# Altium PCB GALX4-0047N_PCB-1109N_REV-A.PcbDoc (part 1 of 2)
Units mil, origin at the board's own origin, x right, y up, seen from the top; angles counter-clockwise.
Board outline 3900 x 7750 mil, 2 copper layers (Top, Bottom), stack 64.8 mil thick; 240 components, 158 nets, 844 pads, 146 vias.
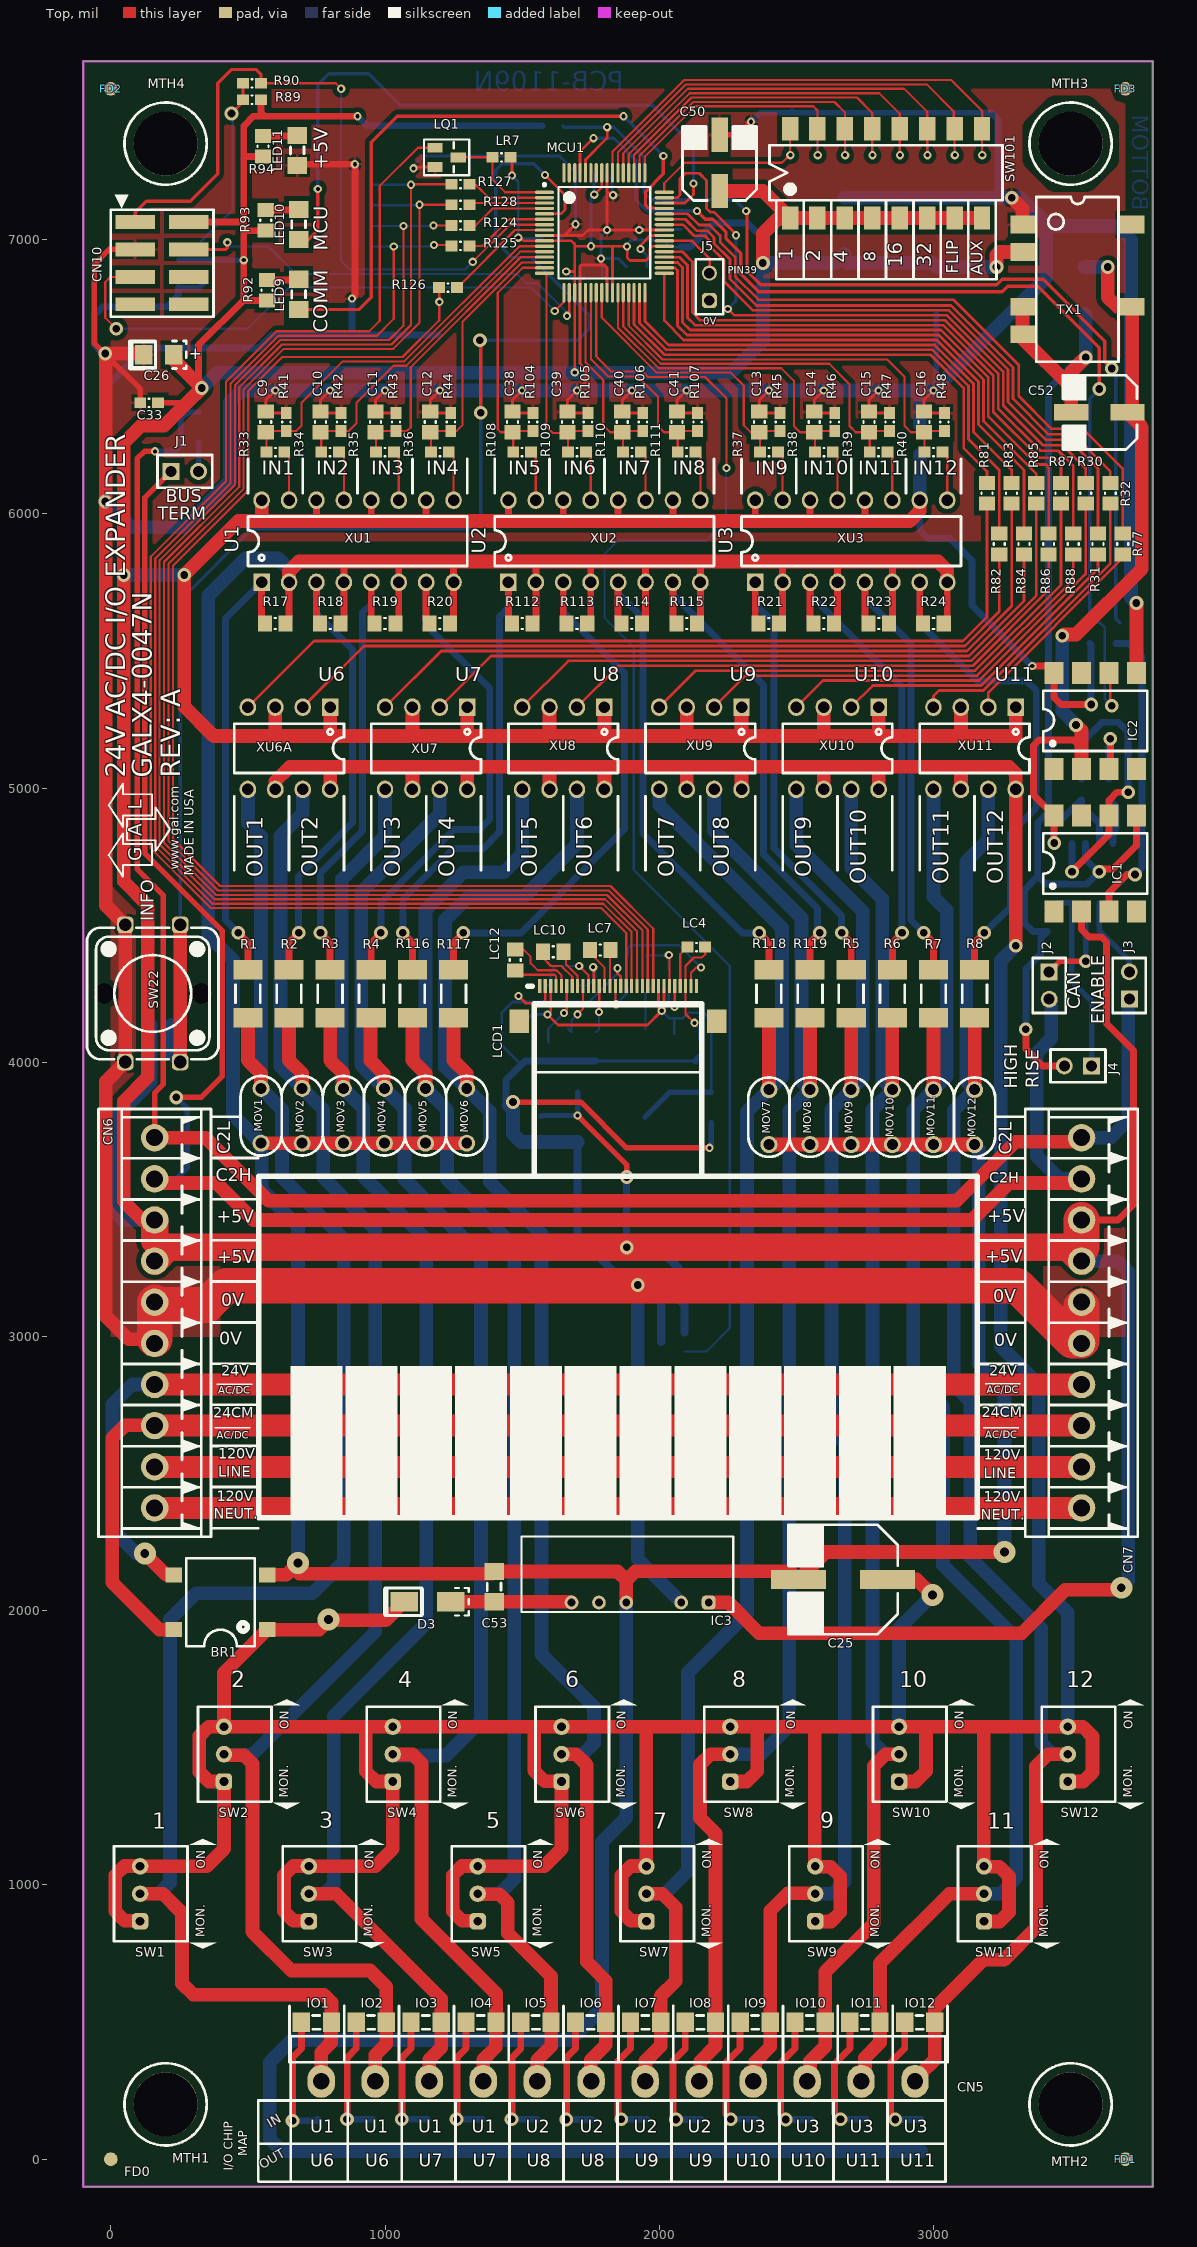
[diagram p0: Top view]
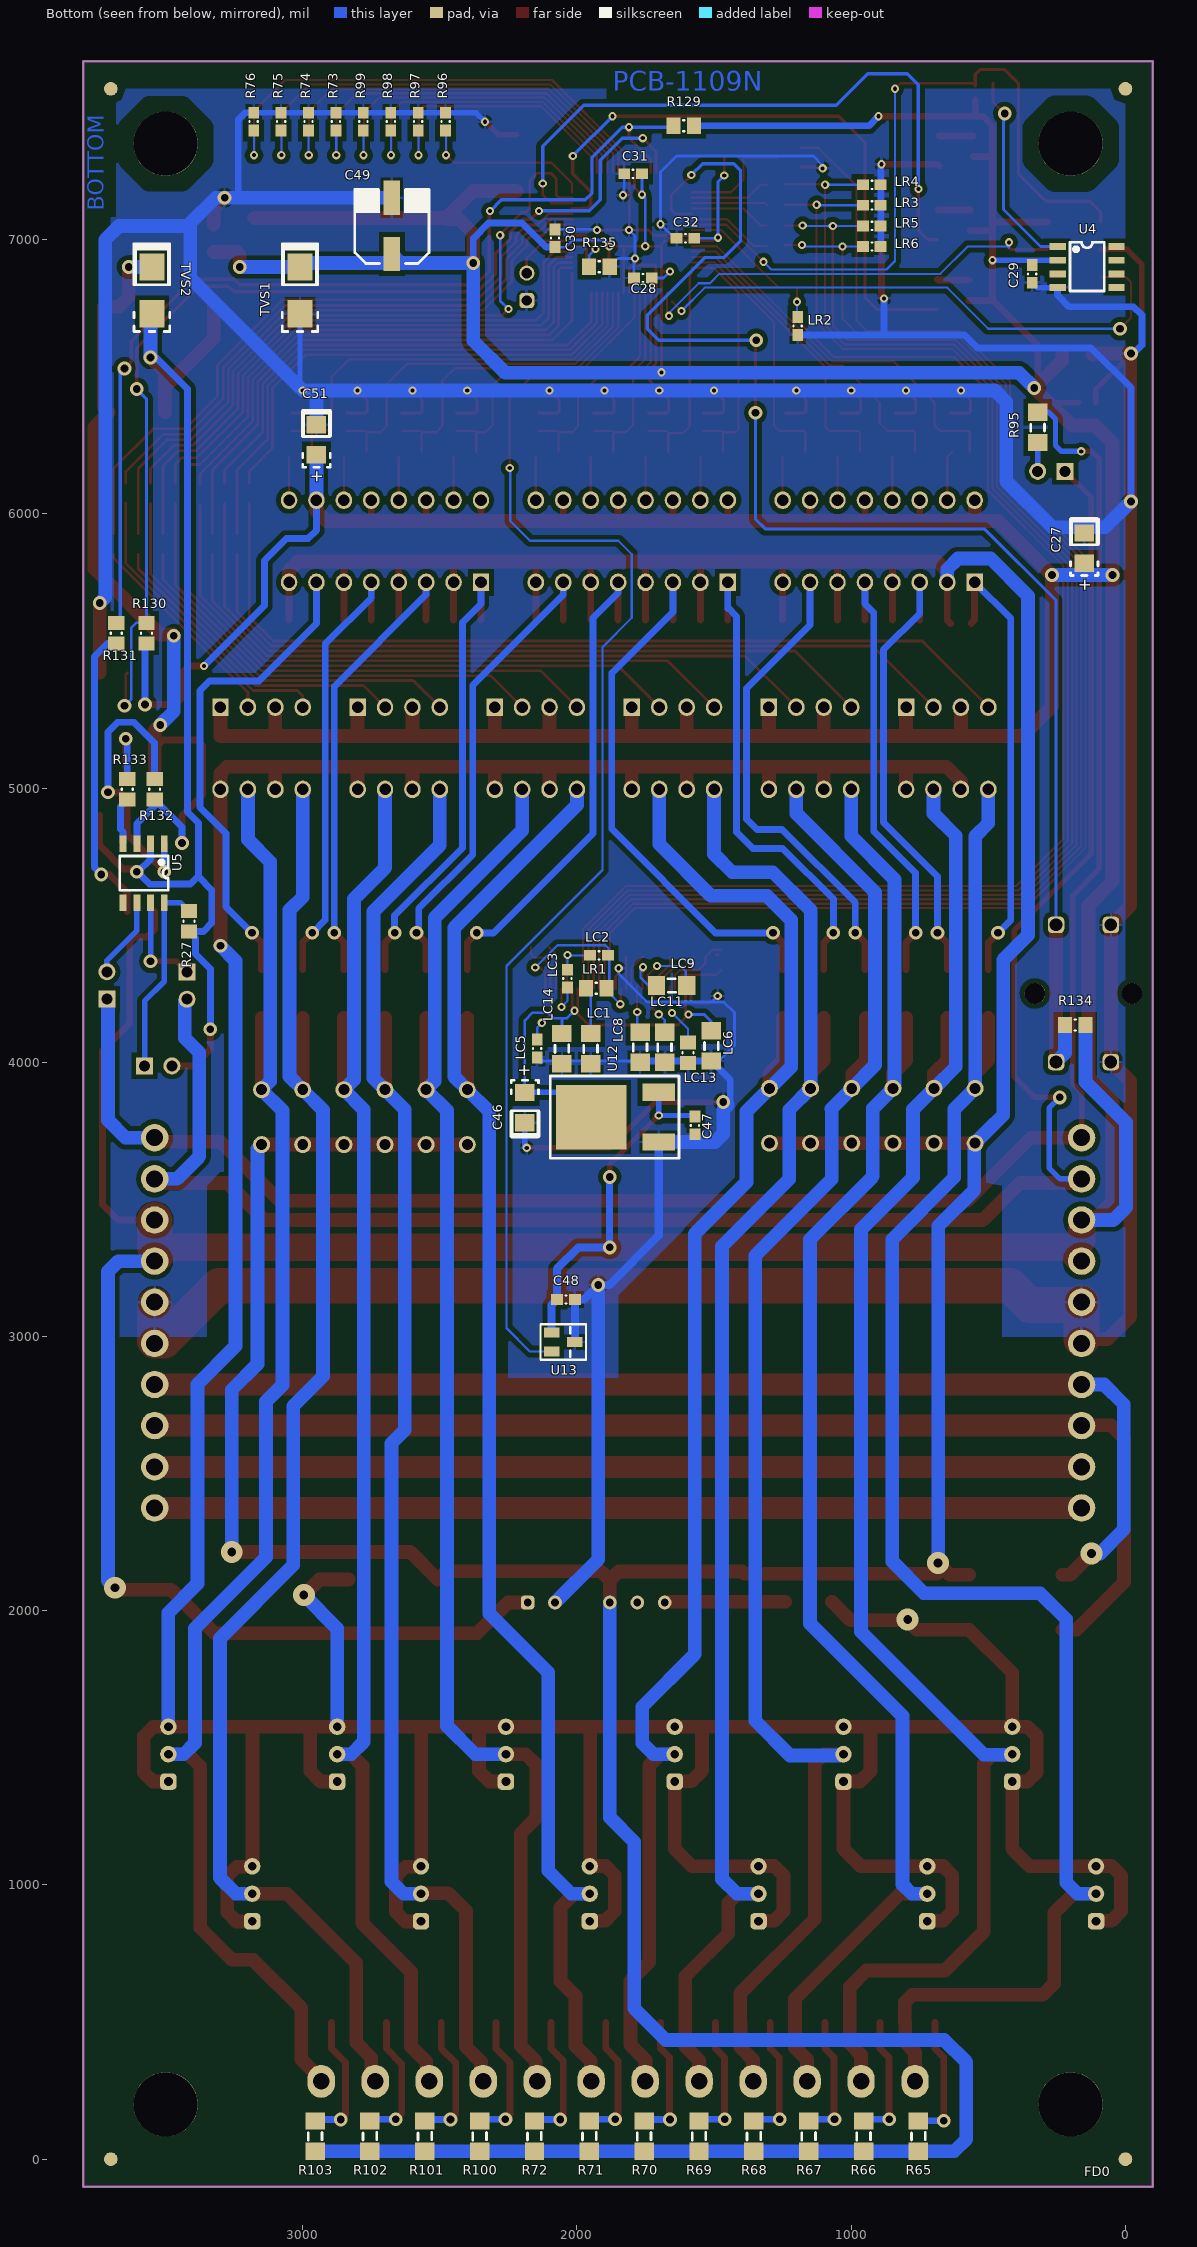
[diagram p1: Bottom view, seen from below]

## Layer stack, top to bottom
Top Mask: solder mask 0.4, Solder Resist, Dk 3.5
Top: signal copper 1.4
Dielectric1: core 62, FR-4, Dk 4.8
Bottom: signal copper 1.4
Bot Mask: solder mask 0.4, Solder Resist, Dk 3.5

## Board outline
-100,-100 -100,7650 3800,7650 3800,-100

## Design rules (kind name [scope] priority, off if disabled: settings)
Clearance MCU_PAD [(InComponent('MCU1') or InComponent('LCD1')) vs (IsPad)] p1: gap=4
Clearance 120VAC [InNetClass('120VAC')] p2: gap=16
Clearance Clearance_POLY [(IsRegion)] p3: gap=18
Clearance Clearance_PadToPad [IsPad vs IsPad] p4: gap=15
Clearance Clearance_PadToLine [IsPad vs IsWire] p5: gap=8
Clearance Clearance_LineToLine [IsWire vs IsWire] p6: gap=8
Clearance Clearance_ViaToPad [IsVia vs IsPad] p7: gap=15
Clearance Clearance_ViaToLine [IsVia vs IsWire] p8: gap=8
Clearance Clearance_ViaToVia [IsVia vs IsVia] p9: gap=15
Clearance Clearance_Design_HoleToHole [(IsVia Or IsThruPin) vs (IsVia Or IsThruPin)] p10: gap=13
Clearance [All] p11: gap=10
ComponentClearance [All] p1: gap=0 collisioncheckmode=3 verticalgap=10 showdistances=TRUE
FabricationTestPointUsage TestPointUsage [All] p1: valid=0 allowmultiple=FALSE
FabricationTestpoint Testpoint [All] p1: side=3 testpointundercomponent=TRUE minsize=40 maxsize=100 preferedsize=60 minholesize=0 maxholesize=40 preferedholesize=32 testpointgrid=1 allowsidetop=TRUE allowsidebottom=TRUE usegrid=TRUE gridtolerance=0.01
HoleSize MNT_HOLE [(InPadClass('MOUNTING_HOLE'))] p1: absolutevalues=TRUE maxlimit=300 minlimit=1 maxpercent=80.000 minpercent=20.000
HoleSize FIDUCIAL [(InPadClass('FIDUCIAL'))] p2: absolutevalues=TRUE maxlimit=100 minlimit=0 maxpercent=80.000 minpercent=20.000
HoleSize [All] p3: absolutevalues=TRUE maxlimit=200 minlimit=1 maxpercent=80.000 minpercent=20.000
PlaneClearance [All] p1: clearance=10
PolygonConnect PolygonConnect_4 [IsPolygon And InNet('COM') And OnLayer('Bottom') vs IsVia] p1: connectstyle=Relief reliefconductorwidth=7 reliefentries=4 polygonreliefangle="45 Angle" airgapwidth=10
PolygonConnect PolygonConnect_3 [IsPolygon And InNet('COM') And OnLayer('Bottom') vs IsPad] p2: connectstyle=Relief reliefconductorwidth=7 reliefentries=4 polygonreliefangle="45 Angle" airgapwidth=10
PolygonConnect PolygonConnect_2 [IsPolygon And InNet('COM') And OnLayer('Top') vs IsVia] p3: connectstyle=Relief reliefconductorwidth=7 reliefentries=4 polygonreliefangle="45 Angle" airgapwidth=10
PolygonConnect PolygonConnect_1 [IsPolygon And InNet('COM') And OnLayer('Top') vs IsPad] p4: connectstyle=Relief reliefconductorwidth=7 reliefentries=4 polygonreliefangle="45 Angle" airgapwidth=10
PolygonConnect [All] p5: connectstyle=Relief reliefconductorwidth=10 reliefentries=4 polygonreliefangle="90 Angle" airgapwidth=10
RoutingVias [All] p1: holewidth=28 width=50 viastyle="Through Hole" minholewidth=15 minwidth=30 maxholewidth=60 maxwidth=50
SilkToSolderMaskClearance SilkscreenOverComponentPads [IsPad] p1: minsilkscreentomaskgap=10 clearancetoexposedcopper=TRUE
SolderMaskExpansion [All] p1: expansion=4
UnpouredPolygon [All] p1: allowunpoured=FALSE
Width Width_L-POWER [InNetClass('L-POWER')] p1: maxlimit=150 minlimit=10 preferedwidth=50
Width Width_120 [InNetClass('120VAC')] p2: maxlimit=130 minlimit=25 preferedwidth=50
Width [All] p3: maxlimit=100 minlimit=8 preferedwidth=8
23 further rules are at their usual default settings.

## Classes and differential pairs
net class L-POWER: 0V +3.3V +5V
pad class MOUNTING_HOLE: MTH1-MntHole MTH2-MntHole MTH3-MntHole MTH4-MntHole
pad class FIDUCIAL: Free-FD
component class "GALaxy 4 IO Simulator_LCD": LC1 LC2 LC3 LC4 LC5 LC6 LC7 LC8 LC9 LC10 LC11 LC12 LC13 LC14 LCD1 LQ1 LR1 LR2 LR3 LR4 LR5 LR6 LR7
component class "GALaxy 4 IO Simulator_1": BR1 C9 C10 C11 C12 C13 C14 C15 C16 C25 C38 C39 C40 C41 C53 CN6 CN7 D3 FD0 FD1 FD2 FD3 IC3 MTH1 MTH2 MTH3 MTH4 R1 R2 R3 R4 R5 R6 R7 R8 R17 R18 R19 R20 R21 R22 R23 R24 R33 R34 R35 R36 R37 R38 R39 R40 R41 R42 R43 R44 R45 R46 R47 R48 R104 R105 R106 R107 R108 R109 R110 R111 R112 R113 R114 R115 R116 R117 R118 R119 U1 U2 U3 XU1 XU2 XU3
component class "GALaxy 4 IO Simulator_Micro": C26 C27 C28 C29 C30 C31 C32 C33 C46 C47 C48 C49 C50 C51 C52 CN10 IC1 IC2 J1 J2 J3 J4 J5 LED9 LED10 LED11 MCU1 R27 R73 R74 R75 R76 R89 R90 R92 R93 R94 R95 R96 R97 R98 R99 R124 R125 R126 R127 R128 R129 R130 R131 R132 R133 R134 R135 SW22 SW101 TVS1 TVS2 TX1 U4 U5 U12 U13
component class "GALaxy 4 IO Simulator_2": CN5 IO1 IO2 IO3 IO4 IO5 IO6 IO7 IO8 IO9 IO10 IO11 IO12 MOV1 MOV2 MOV3 MOV4 MOV5 MOV6 MOV7 MOV8 MOV9 MOV10 MOV11 MOV12 R30 R31 R32 R65 R66 R67 R68 R69 R70 R71 R72 R77 R81 R82 R83 R84 R85 R86 R87 R88 R100 R101 R102 R103 SW1 SW2 SW3 SW4 SW5 SW6 SW7 SW8 SW9 SW10 SW11 SW12 U6 U7 U8 U9 U10 U11 XCN5 XU6A XU7 XU8 XU9 XU10 XU11

## Components (designator, comment, footprint, x,y, rotation, side; value= is the part's Value field where it differs from the comment)
BR1 "1000V 1.5A" SDIP4 400,2031 r180 top
C9 "CAP-0098N" 0805 565,6335 r90 top
C10 "CAP-0098N" 0805 765,6335 r90 top
C11 "CAP-0098N" 0805 965,6335 r90 top
C12 "CAP-0098N" 0805 1165,6335 r90 top
C13 "CAP-0098N" 0805 2365,6335 r90 top
C14 "CAP-0098N" 0805 2565,6335 r90 top
C15 "CAP-0098N" 0805 2765,6335 r90 top
C16 "CAP-0098N" 0805 2965,6335 r90 top
C25 "100uF 63V" D10.3 2670,2114 r270 top
C26 "CAP-0102N" 1206POL 175,6580 r180 top
C27 "CAP-0102N" 1206POL 150,5875 r90 bottom
C28 "CAP-0112N" 0603 1760,6860 r0 bottom
C29 "CAP-0112N" 0603 340,6875 r270 bottom
C30 "CAP-0112N" 0603 2080,7005 r90 bottom
C31 "CAP-0112N" 0603 1795,7240 r0 bottom
C32 "CAP-0112N" 0603 1605,7005 r0 bottom
C33 "CAP-0112N" 0603 140,6405 r180 top
C38 "CAP-0098N" 0805 1465,6335 r90 top
C39 "CAP-0098N" 0805 1665,6335 r90 top
C40 "CAP-0098N" 0805 1865,6335 r90 top
C41 "CAP-0098N" 0805 2065,6335 r90 top
C46 "CAP-0102N" 1206POL 2190,3835 r270 bottom
C47 "CAP-0112N" 0603 1570,3770 r90 bottom
C48 "CAP-0112N" 0603 2040,3135 r180 bottom
C49 "CAP-0120N" D6.3 2675,7050 r0 bottom
C50 "CAP-0120N" D6.3 2220,7280 r180 top
C51 "CAP-0102N" 1206POL 2950,6270 r90 bottom
C52 "CAP-0097N" D6.3 3605,6370 r270 top
C53 "1uF 100V X7R" "1206 - CAP" 1398,2088 r270 top
CN5 "CONN-0310N" CNPIN-5MM-12P-NOSCR 767.32,284 r0 top locked
CN6 "CONN-0193N" CN_150_10P_VERT 160,2375 r90 top locked
CN7 "CONN-0193N" CN_150_10P_VERT 3540,2375 r90 top
CN10 "CONN-0220N" SCKT-4POS8PINDUALROWSMT 187,6914 r0 top
D3 "600V 1A" SMA 1155,2033 r180 top
FD0 "FIDUCIAL-50MIL" FIDUCIAL-50MIL 0,0 r0 top locked
FD1 "FIDUCIAL-50MIL" FIDUCIAL-50MIL 3700,0 r0 top locked
FD2 "FIDUCIAL-50MIL" FIDUCIAL-50MIL 0,7550 r0 top locked
FD3 "FIDUCIAL-50MIL" FIDUCIAL-50MIL 3700,7550 r0 top locked
IC1 "IC-0114N" SMD8 3590,4725 r90 top
IC2 "IC-0114N" SMD8 3590,5245 r90 top
IC3 "PDM2-S5-S24-S" PDM2-S5-S24-S 2180,2030 r180 top
IO1 "LED-0013N" 1206-LED-GREEN 750,499 r180 top
IO2 "LED-0013N" 1206-LED-GREEN 950,499 r180 top
IO3 "LED-0013N" 1206-LED-GREEN 1150,499 r180 top
IO4 "LED-0013N" 1206-LED-GREEN 1350,499 r180 top
IO5 "LED-0013N" 1206-LED-GREEN 1550,499 r180 top
IO6 "LED-0013N" 1206-LED-GREEN 1750,499 r180 top
IO7 "LED-0013N" 1206-LED-GREEN 1950,499 r180 top
IO8 "LED-0013N" 1206-LED-GREEN 2150,499 r180 top
IO9 "LED-0013N" 1206-LED-GREEN 2350,499 r180 top
IO10 "LED-0013N" 1206-LED-GREEN 2550,499 r180 top
IO11 "LED-0013N" 1206-LED-GREEN 2750,499 r180 top
IO12 "LED-0013N" 1206-LED-GREEN 2950,499 r180 top
J1 "CONN-0295N" JUMPER-2POS-SMT 270,6155 r0 top
J2 "CONN-0295N" JUMPER-2POS-SMT 3422,4280 r270 top
J3 "CONN-0295N" JUMPER-2POS-SMT 3714,4280 r90 top
J4 "CONN-0295N" JUMPER-2POS-SMT 3527,3987 r180 top
J5 "TSW-102-07-T-S" TSW-102-07-T-S 2183,6828 r90 top
LC1 "CAP-0110N" 1206 1950,4050 r270 bottom
LC2 "CAP-0112N" 0603 1920,4390 r180 bottom
LC3 "CAP-0112N" 0603 2035,4305 r90 bottom
LC4 "CAP-0112N" 0603 2135,4420 r180 top
LC5 "CAP-0112N" 0603 2145,4050 r270 bottom
LC6 "CAP-0110N" 1206 1510,4060 r270 bottom
LC7 "CAP-0123N" 0805 1785,4410 r180 top
LC8 "CAP-0110N" 1206 1770,4055 r270 bottom
LC9 "CAP-0110N" 1206 1655,4280 r180 bottom
LC10 "CAP-0124N" 0805 1613,4403 r180 top
LC11 "CAP-0110N" 1206 1680,4055 r270 bottom
LC12 "CAP-0098N" 0805 1475,4373 r270 top
LC13 "CAP-0124N" 0805 1595,4035 r270 bottom
LC14 "CAP-0110N" 1206 2055,4050 r270 bottom
LCD1 "CONN-0278N" LCD-KENT-120X33-NOTIT 1850,4150 r180 top locked
LED9 "LED-0014N" 1206-LED-RED 685,6800 r90 top (schematic designator D9)
LED10 "LED-0014N" 1206-LED-RED 685,7055 r90 top (schematic designator D10)
LED11 "LED-0013N" 1206-LED-GREEN 680,7325 r90 top (schematic designator D11)
LQ1 "XTOR-0020N" SOT-23 1225,7300 r270 top
LR1 "RES-0332N" 0805 1930,4270 r0 bottom
LR2 "RES-0314N" 0603 1195,6685 r270 bottom
LR3 "RES-0314N" 0603 925,7125 r180 bottom
LR4 "RES-0314N" 0603 925,7200 r180 bottom
LR5 "RES-0314N" 0603 925,7050 r180 bottom
LR6 "RES-0314N" 0603 925,6975 r180 bottom
LR7 "RES-0314N" 0603 1425,7300 r0 top
MCU1 "IC-0157N" TQFP-64_N 1800,7025 r0 top
MOV1 "MOV-0012N" DISC-280DX150WX200P 548,3905 r270 top locked
MOV2 "MOV-0012N" DISC-280DX150WX200P 698,3905 r270 top locked
MOV3 "MOV-0012N" DISC-280DX150WX200P 848,3905 r270 top locked
MOV4 "MOV-0012N" DISC-280DX150WX200P 998,3905 r270 top locked
MOV5 "MOV-0012N" DISC-280DX150WX200P 1148,3905 r270 top locked
MOV6 "MOV-0012N" DISC-280DX150WX200P 1298,3905 r270 top locked
MOV7 "MOV-0012N" DISC-280DX150WX200P 2400,3900 r270 top locked
MOV8 "MOV-0012N" DISC-280DX150WX200P 2550,3900 r270 top locked
MOV9 "MOV-0012N" DISC-280DX150WX200P 2700,3900 r270 top locked
MOV10 "MOV-0012N" DISC-280DX150WX200P 2850,3900 r270 top locked
MOV11 "MOV-0012N" DISC-280DX150WX200P 3000,3900 r270 top locked
MOV12 "MOV-0012N" DISC-280DX150WX200P 3150,3900 r270 top locked
MTH1 "HWPC-0018N" "STANDOFF-8-5/8\"" 200,200 r0 top locked
MTH2 "HWPC-0018N" "STANDOFF-8-5/8\"" 3500,200 r0 top
MTH3 "HWPC-0018N" "STANDOFF-8-5/8\"" 3500,7350 r0 top
MTH4 "HWPC-0018N" "STANDOFF-8-5/8\"" 200,7350 r0 top
R1 "RES-0348N" 2010 500,4250 r90 top
R2 "RES-0348N" 2010 650,4250 r90 top
R3 "RES-0348N" 2010 800,4250 r90 top
R4 "RES-0348N" 2010 950,4250 r90 top
R5 "RES-0348N" 2010 2700,4250 r90 top
R6 "RES-0348N" 2010 2850,4250 r90 top
R7 "RES-0348N" 2010 3000,4250 r90 top
R8 "RES-0348N" 2010 3150,4250 r90 top
R17 "RES-0338N" 0805 600,5600 r0 top
R18 "RES-0338N" 0805 800,5600 r0 top
R19 "RES-0338N" 0805 1000,5600 r0 top
R20 "RES-0338N" 0805 1200,5600 r0 top
R21 "RES-0338N" 0805 2400,5600 r0 top
R22 "RES-0338N" 0805 2600,5600 r0 top
R23 "RES-0338N" 0805 2800,5600 r0 top
R24 "RES-0338N" 0805 3000,5600 r0 top
R27 "RES-0280N" 0805 3415,4515 r270 bottom
R30 "RES-0291N" 0805 3555,6075 r270 top
R31 "RES-0291N" 0805 3600,5890 r270 top
R32 "RES-0291N" 0805 3645,6075 r270 top
R33 "RES-0315N" 0603 600,6225 r0 top
R34 "RES-0315N" 0603 800,6225 r0 top
R35 "RES-0315N" 0603 1000,6225 r0 top
R36 "RES-0315N" 0603 1200,6225 r0 top
R37 "RES-0315N" 0603 2400,6225 r0 top
R38 "RES-0315N" 0603 2600,6225 r0 top
R39 "RES-0315N" 0603 2800,6225 r0 top
R40 "RES-0315N" 0603 3000,6225 r0 top
R41 "RES-0314N" 0603 640,6335 r90 top
R42 "RES-0314N" 0603 840,6335 r90 top
R43 "RES-0314N" 0603 1040,6335 r90 top
R44 "RES-0314N" 0603 1240,6335 r90 top
R45 "RES-0314N" 0603 2440,6335 r90 top
R46 "RES-0314N" 0603 2640,6335 r90 top
R47 "RES-0314N" 0603 2840,6335 r90 top
R48 "RES-0314N" 0603 3040,6335 r90 top
R65 "RES-0294N" 1206 755,84 r270 bottom
R66 "RES-0294N" 1206 955,84 r270 bottom
R67 "RES-0294N" 1206 1155,84 r270 bottom
R68 "RES-0294N" 1206 1355,84 r270 bottom
R69 "RES-0294N" 1206 1555,84 r270 bottom
R70 "RES-0294N" 1206 1755,84 r270 bottom
R71 "RES-0294N" 1206 1955,84 r270 bottom
R72 "RES-0294N" 1206 2155,84 r270 bottom
R73 "RES-0314N" 0603 2879,7430 r90 bottom
R74 "RES-0314N" 0603 2979,7430 r90 bottom
R75 "RES-0314N" 0603 3079,7430 r90 bottom
R76 "RES-0314N" 0603 3179,7430 r90 bottom
R77 "RES-0291N" 0805 3690,5890 r270 top
R81 "RES-0291N" 0805 3195,6075 r270 top
R82 "RES-0291N" 0805 3240,5890 r270 top
R83 "RES-0291N" 0805 3285,6075 r270 top
R84 "RES-0291N" 0805 3330,5890 r270 top
R85 "RES-0291N" 0805 3375,6075 r270 top
R86 "RES-0291N" 0805 3420,5890 r270 top
R87 "RES-0291N" 0805 3465,6075 r270 top
R88 "RES-0291N" 0805 3510,5890 r270 top
R89 "RES-0314N" 0603 515,7510 r0 top
R90 "RES-0317N" 0603 515,7570 r180 top
R92 "RES-0272N" 0805 570,6815 r270 top
R93 "RES-0272N" 0805 565,7070 r270 top
R94 "RES-0272N" 0805 555,7340 r90 top
R95 "RES-0269N" 1206 320,6315 r270 bottom
R96 "RES-0314N" 0603 2479,7430 r90 bottom
R97 "RES-0314N" 0603 2579,7430 r90 bottom
R98 "RES-0314N" 0603 2679,7430 r90 bottom
R99 "RES-0314N" 0603 2779,7430 r90 bottom
R100 "RES-0294N" 1206 2355,84 r270 bottom
R101 "RES-0294N" 1206 2555,84 r270 bottom
R102 "RES-0294N" 1206 2755,84 r270 bottom
R103 "RES-0294N" 1206 2955,84 r270 bottom
R104 "RES-0314N" 0603 1540,6335 r90 top
R105 "RES-0314N" 0603 1740,6335 r90 top
R106 "RES-0314N" 0603 1940,6335 r90 top
R107 "RES-0314N" 0603 2140,6335 r90 top
R108 "RES-0315N" 0603 1500,6225 r0 top
R109 "RES-0315N" 0603 1700,6225 r0 top
R110 "RES-0315N" 0603 1900,6225 r0 top
R111 "RES-0315N" 0603 2100,6225 r0 top
R112 "RES-0338N" 0805 1500,5600 r0 top
R113 "RES-0338N" 0805 1700,5600 r0 top
R114 "RES-0338N" 0805 1900,5600 r0 top
R115 "RES-0338N" 0805 2100,5600 r0 top
R116 "RES-0348N" 2010 1100,4250 r90 top
R117 "RES-0348N" 2010 1250,4250 r90 top
R118 "RES-0348N" 2010 2400,4250 r90 top
R119 "RES-0348N" 2010 2550,4250 r90 top
R124 "RES-0360N" 0603 1275,7052 r0 top
R125 "RES-0360N" 0603 1275,6977 r0 top
R126 "RES-0360N" 0603 1230,6825 r0 top
R127 "RES-0360N" 0603 1275,7202 r180 top
R128 "RES-0360N" 0603 1275,7127 r180 top
R129 "RES-0291N" 0805 1610,7415 r180 bottom
R130 "RES-0291N" 0805 3570,5565 r270 bottom
R131 "RES-0291N" 0805 3680,5565 r270 bottom
R132 "RES-0293N" 0805 3540,4995 r270 bottom
R133 "RES-0291N" 0805 3640,4995 r270 bottom
R134 "RES-0272N" 0805 183,4136 r180 bottom
R135 "RES-0272N" 0805 1918,6901 r180 bottom
SW1 "ON-OFF-MON" B19AP 146,968 r90 top
SW2 "ON-OFF-MON" B19AP 451.73,1477 r90 top
SW3 "ON-OFF-MON" B19AP 761.45,968 r90 top
SW4 "ON-OFF-MON" B19AP 1067.18,1477 r90 top
SW5 "ON-OFF-MON" B19AP 1376.91,968 r90 top
SW6 "ON-OFF-MON" B19AP 1682.64,1477 r90 top
SW7 "ON-OFF-MON" B19AP 1992.36,968 r90 top
SW8 "ON-OFF-MON" B19AP 2298.09,1477 r90 top
SW9 "ON-OFF-MON" B19AP 2607.82,968 r90 top
SW10 "ON-OFF-MON" B19AP 2913.54,1477 r90 top
SW11 "ON-OFF-MON" B19AP 3223.27,968 r90 top
SW12 "ON-OFF-MON" B19AP 3529,1477 r90 top
SW22 "SW-0071N" PB_500X500-TH 153,4251 r180 top (schematic designator SW2)
SW101 "SW-0072N" SMD-8DIPSWITCH 2827,7241.5 r90 top locked (schematic designator SW1)
TVS1 "DIOD-0086N" SMB 3010,6815 r90 bottom
TVS2 "DIOD-0086N" SMB 3550,6815 r90 bottom
TX1 "IC-0148N" DC-DC-RECOM-0.5W-SMT 3525,6855 r0 top
U1 "IC-0068N" DIP16FORSMD 550,5750 r90 top locked
U2 "IC-0068N" DIP16FORSMD 1450,5750 r90 top locked
U3 "IC-0068N" DIP16FORSMD 2350,5750 r90 top locked
U4 "IC-0112N" SOIC8 140,6900 r180 bottom
U5 "IC-0111N" SOIC8 3580,4690 r270 bottom
U6 "IC-0187N" DIP8FORSMD 800,5295 r270 top
U7 "IC-0187N" DIP8FORSMD 1300,5295 r270 top
U8 "IC-0187N" DIP8FORSMD 1800,5295 r270 top
U9 "IC-0187N" DIP8FORSMD 2300,5295 r270 top
U10 "IC-0187N" DIP8FORSMD 2800,5295 r270 top
U11 "IC-0187N" DIP8FORSMD 3300,5295 r270 top
U12 "IC-0163N" DPAK 1850,3800 r0 bottom
U13 "IC-0183N" SOT-23 2050,2980 r270 bottom
XU1 "SCKT-0029N" SCKT-SMD16 900,5900 r90 top
XU2 "SCKT-0029N" SCKT-SMD16 1800,5900 r90 top
XU3 "SCKT-0029N" SCKT-SMD16 2700,5900 r90 top
XU6A "SCKT-0028N" SCKT-SMD8 650,5145 r270 top
XU7 "SCKT-0028N" SCKT-SMD8 1150,5145 r270 top
XU8 "SCKT-0028N" SCKT-SMD8 1650,5145 r270 top
XU9 "SCKT-0028N" SCKT-SMD8 2150,5145 r270 top
XU10 "SCKT-0028N" SCKT-SMD8 2650,5145 r270 top
XU11 "SCKT-0028N" SCKT-SMD8 3150,5145 r270 top

## Footprints (in the part's own frame and the unit in brackets; to place one, negate y for a bottom-side part, rotate by r counter-clockwise, add the part's x,y. Pads: shape width x height; smd on the part's side, far side on the other; paste and mask are expansions set on the pad)
0603 [mm]
  rect 1.1x1 smd paste+0 mask+0.102: 1(-0.826,0) 2(0.826,0)
  silkscreen extent -0.04,-0.38 0.04,0.38, body extent -0.76,-0.38 0.76,0.38, height 0.51
0805 [mm]
  rect 1.3x1.5 smd paste+0 mask+0.102: 1(-0.953,0) 2(0.953,0)
  silkscreen extent -0.06,-0.51 0.06,0.51, body extent -1.02,-0.51 1.02,0.51, height 0.76
1206 [mm]
  rect 1.6x1.8 smd paste+0 mask+0.102: 1(-1.397,0) 2(1.397,0)
  silkscreen extent -0.33,-0.64 0.36,0.64, body extent -1.52,-0.76 1.52,0.76, height 0.64
"1206 - CAP" [mm]
  rect 1.6x1.8 smd paste+0 mask+0.102: 1(-1.397,0) 2(1.397,0)
  silkscreen extent -0.33,-0.64 0.36,0.64, body extent -1.6,-0.8 1.6,0.8, height 1
1206-LED-GREEN [mm]
  rect 1.6x1.8 smd paste+0 mask+0.102: 1(-1.397,0) 2(1.397,0)
  silkscreen extent -0.33,-0.64 0.36,0.64, body extent -1.52,-0.76 1.52,0.76, height 1.27
1206-LED-RED [mm]
  rect 1.6x1.8 smd paste+0 mask+0.102: 1(-1.397,0) 2(1.397,0)
  silkscreen extent -0.33,-0.64 0.36,0.64, body extent -1.52,-0.76 1.52,0.76, height 1.27
1206POL [mm]
  rect 1.6x1.8 smd paste+0 mask+0.102: 1(-1.397,0) 2(1.397,0)
  silkscreen extent -2.54,-1.27 2.67,1.3, body extent -1.52,-0.76 1.52,0.76, height 1.02
2010 [mm]
  rect 1.8x2.7 smd paste+0 mask+0.102: 1(-2.222,0) 2(2.222,0)
  silkscreen extent -0.83,-1.14 0.83,1.14, body extent -2.54,-1.27 2.54,1.27, height 0.64
B19AP [mil] "Miniature Toggle SW"
  rrect50% 60x60 hole 32: 1(-100,39)
  round 60 hole 32: 2(0,39) 3(100,39)
  silkscreen extent -173,-134 173,134, body extent -173,-134 173,134, height 862
CN_150_10P_VERT [mil]
  round 100 hole 62: 1(0,0) 2(150,0) 3(300,0) 4(450,0) 5(600,0) 6(750,0) 7(900,0) 8(1050,0) 9(1200,0) 10(1350,0)
  silkscreen extent -105,-205 1455,205, body extent -105,-210 1455,205, height 875
CNPIN-5MM-12P-NOSCR [mil]
  oval 100x120 hole 60 paste+0 mask+4: 1(0,0) 2(196.85,0) 3(393.7,0) 4(590.55,0) 5(787.4,0) 6(984.25,0) 7(1181.1,0) 8(1377.95,0) 9(1574.8,0) 10(1771.65,0) 11(1968.5,0) 12(2165.35,0)
  oval 102x122 on Top Paste paste+4 mask+4: paste(0,0) paste(196.85,0) paste(393.7,0) paste(590.55,0) paste(787.4,0) paste(984.25,0) paste(1181.1,0) paste(1377.95,0) paste(1574.8,0) paste(1771.65,0) paste(1968.5,0) paste(2165.35,0)
  silkscreen extent -111,-366 2276,164, body extent -113,-70 2276,70, height 450
D6.3 [mil]
  rect 60x125 smd paste+0 mask+4: 1(0,102.5) 2(0,-102.5)
  silkscreen extent -135,-132 135,138, body extent -135,-133 135,138, height 201
D10.3 [mil]
  rect 70x200 smd paste+0 mask+4: 1(0,162.5) 2(0,-162.5)
  silkscreen extent -200,-200 200,200, body extent -203,-228 203,228, height 402
DC-DC-RECOM-0.5W-SMT [mil]
  rect 90x65 smd paste+0 mask+4: 1(-200,200) 2(-200,100) 4(-200,-200) 4(-200,-100) 7(200,-100) 10(200,200)
  silkscreen extent -150,-300 150,300, body extent -210,-300 210,300, height 291
DIP8FORSMD [mil]
  rect 64x60 hole 42 paste+0 mask+4: 1(0,0)
  oval 64x60 hole 42 paste+0 mask+4: 2(0,-100) 3(0,-200) 4(0,-300) 5(300,-300) 6(300,-200) 7(300,-100) 8(300,0)
  silkscreen extent 60,-350 240,50, body extent -50,-350 350,50, height 150
DIP16FORSMD [mil]
  rect 64x60 hole 42 paste+0 mask+4: 1(0,0)
  oval 64x60 hole 42 paste+0 mask+4: 2(0,-100) 3(0,-200) 4(0,-300) 5(0,-400) 6(0,-500) 7(0,-600) 8(0,-700) 9(300,-700) 10(300,-600) 11(300,-500) 12(300,-400) 13(300,-300) 14(300,-200) 15(300,-100) 16(300,0)
  silkscreen extent 60,-750 240,50, body extent -34,-755 334,55, height 150
DISC-280DX150WX200P [mil]
  round 62 hole 40 paste+0 mask+4: 1(0,0) 2(200,0)
  silkscreen extent -45,-75 245,75, body extent -40,-70 239,70, height 439
DPAK [mm]
  rect 2.997x1.6 smd paste+0 mask+0.102: 1(-3.76,2.3) 3(-3.76,-2.3)
  rect 6.5x6 smd paste+0 mask+0.102: 2(2.49,0)
  silkscreen extent -5.64,-3.81 6.29,3.81, body extent -5.08,-3.3 5.21,3.3, height 2.29
FIDUCIAL-50MIL [mil]
  round 50 smd paste-1000 mask+25: FD(0,0)
  round 50 smd far side paste-1000 mask+25: FD(0,0)
  Top pour cut-out: 0,55 40,40 55,0 40,-40 0,-55 -40,-40 -55,0 -40,40
  Bottom pour cut-out: 0,55 40,40 55,0 40,-40 0,-55 -40,-40 -55,0 -40,40
JUMPER-2POS-SMT [mil]
  rect 62x62 hole 40 paste+0 mask+4: 1(-50,0)
  round 62 hole 40 paste+0 mask+4: 2(50,0)
  rect 64x64 on Top Paste rot 45 paste+4 mask+4: p1(-50,0) p1(50,0)
  silkscreen extent -100,-60 100,60, body extent -95,-50 95,50, height 340
LCD-KENT-120X33-NOTIT [mm]
  rect 0.3x1.3 smd paste+0 mask+0.038: 1(7.25,-3.251) 2(6.75,-3.251) 3(6.25,-3.251) 4(5.75,-3.251) 5(5.25,-3.251) 6(4.75,-3.251) 7(4.25,-3.251) 8(3.75,-3.251) 9(3.25,-3.251) 10(2.75,-3.251) 11(2.25,-3.251) 12(1.75,-3.251) 13(1.25,-3.251) 14(0.75,-3.251) 15(0.25,-3.251) 16(-0.25,-3.251) 17(-0.75,-3.251) 18(-1.25,-3.251) 19(-1.75,-3.251) 20(-2.25,-3.251) 21(-2.75,-3.251) 22(-3.25,-3.251) 23(-3.75,-3.251) 24(-4.25,-3.251) 25(-4.75,-3.251) 26(-5.25,-3.251) 27(-5.75,-3.251) 28(-6.25,-3.251) 29(-6.75,-3.251) 30(-7.25,-3.251)
  rect 1.8x2.2 smd paste-0.025 mask+0.1: 31(-9.15,-0.001) 32(9.15,-0.001)
  silkscreen extent -33.27,-3.25 33.27,46, body extent -33.27,-2.77 33.27,46, height 2.55
PB_500X500-TH [mil]
  rrect50% 60x60 hole 46 paste+0 mask+4: 1(-100,250) 2(-100,-250) 3(100,250) 4(100,-250)
  round 75 hole 75 unplated paste+0 mask+4: 5(-177,0) 6(177,0)
  silkscreen extent -240,-240 240,240, body extent -240,-240 240,240, height 260
PDM2-S5-S24-S [mil] "DC-DC 5 -->24"
  rrect50% 50x50 hole 28: 1(0,0)
  round 50 hole 28: 2(100,0) 4(300,0) 5(400,0) 6(500,0)
  silkscreen extent -90,-241 682,35, body extent -90,-240 682,35, height 374
SCKT-4POS8PINDUALROWSMT [mil]
  rect 145x50 smd paste+0 mask+4: 1(-97.5,150) 2(97.5,150) 3(-97.5,50) 4(97.5,50) 5(-97.5,-50) 6(97.5,-50) 7(-97.5,-150) 8(97.5,-150)
  silkscreen extent -188,-195 188,250, body extent -99,-201 102,199, height 340
SCKT-SMD8 [mil]
  rect 60x60 on Top Paste paste+0 mask+4: 1(-150,150) 1(-150,-50) 1(-150,50) 1(-150,-150) 1(150,150) 1(150,-50) 1(150,50) 1(150,-150)
  silkscreen extent -90,-200 90,200
SCKT-SMD16 [mil]
  rect 60x60 on Top Paste paste+0 mask+4: 1(-150,250) 1(-150,350) 1(-150,-150) 1(-150,-50) 1(-150,50) 1(-150,150) 1(-150,-350) 1(-150,-250) 1(150,250) 1(150,350) 1(150,-150) 1(150,-50) 1(150,50) 1(150,150) 1(150,-350) 1(150,-250)
  silkscreen extent -90,-400 90,400
SDIP4 [mil]
  rect 60x55 smd paste+0 mask+4: 1(-170,100) 2(-170,-100) 3(170,-100) 4(170,100)
  silkscreen extent -125,-160 125,160, body extent -197,-168 197,167, height 143
SMA [mil]
  rect 100x70 smd paste+0 mask+4: 1(-85,0) 2(85,0)
  silkscreen extent -150,-50 155,50, body extent -108,-55 108,55, height 102
SMB [mil]
  rect 100x90 smd paste+0 mask+4: 1(-85,0) 2(85,0)
  silkscreen extent -150,-65 170,65, body extent -100,-70 100,70, height 81
SMD8 [mil]
  rect 80x70 smd paste+0 mask+4: 1(-175,150) 2(-175,50) 3(-175,-50) 4(-175,-150) 5(175,-150) 6(175,-50) 7(175,50) 8(175,150)
  silkscreen extent -110,-190 110,190, body extent -189,-190 189,188, height 201
SMD-8DIPSWITCH [mil]
  rect 85x60 smd paste+0 mask+4: 1(-162.5,350) 2(-162.5,250) 3(-162.5,150) 4(-162.5,50) 5(-162.5,-50) 6(-162.5,-150) 7(-162.5,-250) 8(-162.5,-350) 9(162.5,-350) 10(162.5,-250) 11(162.5,-150) 12(162.5,-50) 13(162.5,50) 14(162.5,150) 15(162.5,250) 16(162.5,350)
  silkscreen extent -98,-425 103,425, body extent -163,-430 158,430, height 140
SOIC8 [mil]
  rect 60x25 smd paste+0 mask+4: 1(-107.5,75) 2(-107.5,25) 3(-107.5,-25) 4(-107.5,-75) 5(107.5,-75) 6(107.5,-25) 7(107.5,25) 8(107.5,75)
  silkscreen extent -63,-88 63,90, body extent -118,-88 118,90, height 51
SOT-23 [mil]
  rect 36x56 smd paste+0 mask+4: 1(-35,-42.5) 2(0,42.5) 3(35,-42.5)
  silkscreen extent -65,-83 65,83, body extent -60,-63 60,62, height 40
"STANDOFF-8-5/8\"" [mil]
  round 234 hole 234 unplated mask+4: MntHole(0,0)
  Top pour cut-out: -175,-64.64 -167.68,-82.32 -82.32,-167.68 -64.64,-175 64.64,-175 82.32,-167.68 167.68,-82.32 175,-64.64 175,64.64 167.68,82.32 82.32,167.68 64.64,175 -64.64,175 -82.32,167.68 -167.68,82.32 -175,64.64
  Bottom pour cut-out: -175,-64.64 -167.68,-82.32 -82.32,-167.68 -64.64,-175 64.64,-175 82.32,-167.68 167.68,-82.32 175,-64.64 175,64.64 167.68,82.32 82.32,167.68 64.64,175 -64.64,175 -82.32,167.68 -167.68,82.32 -175,64.64
  silkscreen extent -150,-150 150,150, body extent -155,-155 155,155, height 625
TQFP-64_N [mm] "Thin QFP, 64-Leads, Body 10x10mm, Pitch 0.5mm, IPC Medium Density"
  oval 1.8x0.3 smd paste+0 mask+0.038: 1(-5.55,3.75) 2(-5.55,3.25) 3(-5.55,2.75) 4(-5.55,2.25) 5(-5.55,1.75) 6(-5.55,1.25) 7(-5.55,0.75) 8(-5.55,0.25) 9(-5.55,-0.25) 10(-5.55,-0.75) 11(-5.55,-1.25) 12(-5.55,-1.75) 13(-5.55,-2.25) 14(-5.55,-2.75) 15(-5.55,-3.25) 16(-5.55,-3.75) 33(5.55,-3.75) 34(5.55,-3.25) 35(5.55,-2.75) 36(5.55,-2.25) 37(5.55,-1.75) 38(5.55,-1.25) 39(5.55,-0.75) 40(5.55,-0.25) 41(5.55,0.25) 42(5.55,0.75) 43(5.55,1.25) 44(5.55,1.75) 45(5.55,2.25) 46(5.55,2.75) 47(5.55,3.25) 48(5.55,3.75)
  oval 0.3x1.8 smd paste+0 mask+0.038: 17(-3.75,-5.55) 18(-3.25,-5.55) 19(-2.75,-5.55) 20(-2.25,-5.55) 21(-1.75,-5.55) 22(-1.25,-5.55) 23(-0.75,-5.55) 24(-0.25,-5.55) 25(0.25,-5.55) 26(0.75,-5.55) 27(1.25,-5.55) 28(1.75,-5.55) 29(2.25,-5.55) 30(2.75,-5.55) 31(3.25,-5.55) 32(3.75,-5.55) 49(3.75,5.55) 50(3.25,5.55) 51(2.75,5.55) 52(2.25,5.55) 53(1.75,5.55) 54(1.25,5.55) 55(0.75,5.55) 56(0.25,5.55) 57(-0.25,5.55) 58(-0.75,5.55) 59(-1.25,5.55) 60(-1.75,5.55) 61(-2.25,5.55) 62(-2.75,5.55) 63(-3.25,5.55) 64(-3.75,5.55)
  silkscreen extent -5.67,-4.25 4.25,4.57, body extent -5,-5 5,5, height 1.2
TSW-102-07-T-S [mil]
  rrect50% 51.06x51.06 on Top Paste: 0(-50,0)
  rrect50% 55x55 hole 38 paste+0 mask+4: 1(-50,0)
  round 51.06 on Top Paste: 1(50,0)
  round 55 hole 38 paste+0 mask+4: 2(50,0)
  silkscreen extent -100,-50 100,50, body extent -100,-50 100,50, height 330

## Part data
BR1: library part DIOD-0081N, "DIODE,RECT BRIDGE 1000V 1.5A 4SDIP SMT"
C9 C10 C11 C12 C13 C14 C15 C16 C38 C39 C40 C41 LC12: "C-0805-D-4.7U-25V-10%"
C25: library part CAP-0104N, "CAP, 100UF 63V ELECT 20% 10.3MM SMT"
C26 C27 C46 C51: "C-1206-P-D-10U-16V-10%"
C28 C29 C30 C31 C32 C33 C47 C48 LC2 LC3 LC4 LC5: "C-0603-D-0.1U-25V-10%"
C49 C50: "C-D6.3-D-100U-16V-20%"
C52: "C-D6.3-D-22U-25V-20%"
C53: library part CAP-0110N, "CAP, 1UF 100V 10% X7R CERM 1206 SMT"
CN5: "CNPIN_5MM_12P"
CN6 CN7: "CN_150_10P_VERT"
CN10: "SCKT-2X4-.1PITCH"
D3: library part DIOD-0077N, "DIODE,FAST 600V 1A SMA SMT"
IC1 IC2: "OPTOISO-1CH-HS-SMD8"
IC3: library part IC-PDM2-S5-S24-S, "CONV DC/DC 2W  5 --> 24V OUT SIP4"
IO1 IO2 IO3 IO4 IO5 IO6 IO7 IO8 IO9 IO10 IO11 IO12 LED11: "LED-1206-BI-G"
J1 J2 J3 J4: "HEADER_2POS_100MIL_SMT"
J5: library part "CONN-2 POS HEADER", "CONN 2 POS HEADER .100\""
LC1 LC6 LC8 LC9 LC11 LC14: "C-1206-D-1U-100V-10%"
LC7: "C-0805-D-0.47U-50V-10%"
LC10 LC13: "C-0805-D-2.2U-25V-10%"
LCD1: "FLEX-CABLE-30POS-0.5MM"
LED9 LED10: "LED-1206-BI-R"
LQ1: "NMOS-25V-680MA-SOT23"
LR1: "R-0805-A-200R-1/8-5%"
LR2 LR3 LR4 LR5 LR6 LR7 R41 R42 R43 R44 R45 R46 R47 R48 R73 R74 R75 R76 R89 R96 R97 R98 R99 R104 R105 R106 R107: "R-0603-B-10.0K-1/10-5%"
MCU1: "MCU-DSPIC30F5011-20I/PT"
MOV1 MOV2 MOV3 MOV4 MOV5 MOV6 MOV7 MOV8 MOV9 MOV10 MOV11 MOV12: "MOV-30VAC-45VC-250A-7MM-STRAIGHT"
MTH1 MTH2 MTH3 MTH4: "STANDOFF-5/8-SNAP"
R1 R2 R3 R4 R5 R6 R7 R8 R116 R117 R118 R119: "R-2010-B-3.3K-3/4-5%"
R17 R18 R19 R20 R21 R22 R23 R24 R112 R113 R114 R115: "R-0805-A-680R-1/8-5%"
R27: "R-0805-B-47.5K-1/8-1%"
R30 R31 R32 R77 R81 R82 R83 R84 R85 R86 R87 R88 R129 R130 R131 R133: "R-0805-A-330R-1/8-5%"
R33 R34 R35 R36 R37 R38 R39 R40 R108 R109 R110 R111: "R-0603-B-2.0K-1/10-5%"
R65 R66 R67 R68 R69 R70 R71 R72 R100 R101 R102 R103: "R-1206-B-10K-1/4-1%"
R90: "R-0603-B-4.75K-1/10-1%"
R92 R93 R94 R134 R135: "R-0805-B-2.0K-1/8-5%"
R95: "R-1206-A-121R-1/4-1%"
R124 R125 R126 R127 R128: "R-0603-B-6.04K-1/10-1%"
R132: "R-0805-B-1.5K-1/8-1%"
SW1 SW2 SW3 SW4 SW5 SW6 SW7 SW8 SW9 SW10 SW11 SW12: library part SW-0083N, "SWITCH,MOMENTARY TOGGLE"
SW22: "PB_500X500-TH"
SW101: "DIPSW-8CH-SMT"
TVS1 TVS2: "TVS-6.8V-600W-SMB"
TX1: "DC-DC-5VIN-5VO-RECOM-0.5W-SMT"
U1 U2 U3: "LTV-844-DIP16"
U4: "RESETGEN-5V-SOIC"
U5: "CAN_TRX-SOIC8"
U6 U7 U8 U9 U10 U11: "SSR-2CHFET-60V-0.5A-DIP8"
U12: "VREG-3.3VO-1A-DPAK"
U13: "TEMPSENSE-M45TO120C-SOT23"
XU1 XU2 XU3: "SOCKET_SMD16"
XU6A XU7 XU8 XU9 XU10 XU11: "SOCKET_SMD8"

## Via types
v1: diameter 30, hole 15, Top to Bottom, tented both sides, 81 vias
v2: diameter 50, hole 28, Top to Bottom, tented both sides, 59 vias
v3: diameter 80, hole 32, Top to Bottom, tented both sides, 6 vias

## Nets (pads, with @x,y where several pads share a name; then routed paths per layer and width w, separated by ;. In a path a pad name is that pad's centre, name@x,y a point inside that pad or via, vN(x,y) a via of type N, cw(c..) or ccw(c..) an arc to the next point about the centre after c; other vN are vias at no path point)
0V: C9.2 C10.2 C11.2 C12.2 C13.2 C14.2 C15.2 C16.2 C26.2 C27.2 C28.2 C29.2 C30.2 C31.2 C32.2 C33.2 C38.2 C39.2 C40.2 C41.2 C46.2 C47.1 C48.2 C49.2 C50.2 C51.2 CN6.5 CN6.6 CN7.5 CN7.6 CN10.3 IC2.5 IC3.2 J5.1@2183,6778 LC1.2 LC5.2 LC6.2 LC8.2 LC11.2 LC13.2 LC14.2 LCD1.2 LCD1.16 LED11.1 LQ1.3 LR2.2 LR3.2 LR4.2 LR5.2 LR6.2 MCU1.9 MCU1.20 MCU1.25 MCU1.41 MCU1.56 R41.2 R42.2 R43.2 R44.2 R45.2 R46.2 R47.2 R48.2 R73.2 R74.2 R75.2 R76.2 R96.2 R97.2 R98.2 R99.2 R104.2 R105.2 R106.2 R107.2 R135.2 SW22.3 SW22.4 TVS1.1 TX1.1 U4.4 U12.1 U13.2 | length 30894.5
  Top w10: v1(600,6450) 565,6415 C9.2@565,6372.5 570,6367.5 R41.2@640,6367.5 ; v1(800,6450) 765,6415 C10.2@765,6372.5 770,6367.5 R42.2@840,6367.5 ; v1(1000,6450) 965,6415 C11.2@965,6372.5 970,6367.5 R43.2@1040,6367.5 ; v1(1104,7260) 1109,7265 LQ1.3@1182.5,7265 ; v1(1200,6450) 1165,6415 C12.2@1165,6372.5 1170,6367.5 R44.2@1240,6367.5 ; v1(1487,4242) 1513.77,4215.23 1573.77,4215.23 1584.25,4225.71 LCD1.2@1584.25,4267.98 ; v1(1500,6450) 1465,6415 C38.2@1465,6372.5 1470,6367.5 R104.2@1540,6367.5 ; MCU1.9@1581.5,7015.16 1654.16,7015.16 ; v1(1695,7056) 1654.16,7015.16 ; R105.2@1740,6367.5 1670,6367.5 C39.2@1665,6372.5 1665,6415 v1(1700,6450) 1734,6484 1734,6525.96 1711.42,6548.54 MCU1.20@1711.42,6806.5 1711.42,6903.42 1715,6907 1788,6907 ; v1(1788,6931) 1788,6907 ; MCU1.25@1809.84,6806.5 1809.84,6897.16 1800,6907 1788,6907 ; v1@1809.84,7034.84 1739.84,7034.84 1720.16,7015.16 1654.16,7015.16 ; v1(1809.84,7035) 1809.84,7170 ; MCU1.56@1809.84,7243.5 1809.84,7170 ; v1@1810,7034.84 MCU1.41@2018.5,7034.84 ; v1(1832,7162) 1824,7170 1809.84,7170 ; 1848,4324 1859.84,4312.16 LCD1.16@1859.84,4277.98 LCD1.16@1859.84,4267.98 ; v1(1900,6450) 1865,6415 C40.2@1865,6372.5 1870,6367.5 R106.2@1940,6367.5 ; v1(2100,6450) 2065,6415 C41.2@2065,6372.5 2070,6367.5 R107.2@2140,6367.5 ; v1(2400,6450) 2365,6415 C13.2@2365,6372.5 2370,6367.5 R45.2@2440,6367.5 ; v1(2600,6450) 2565,6415 C14.2@2565,6372.5 2570,6367.5 R46.2@2640,6367.5 ; v1(2800,6450) 2765,6415 C15.2@2765,6372.5 2770,6367.5 R47.2@2840,6367.5 ; v1(3000,6450) 2965,6415 C16.2@2965,6372.5 2970,6367.5 R48.2@3040,6367.5
  Top w20: CN10.3@89.5,6964 -6,6964 -60,6910 -60,6622 -18,6580 107.5,6454.5 C33.2@107.5,6405 ; v2(1467,3855) 1714,3855 1881,3688 v1(2183,3688) ; C50.2@2220,7382.5 2287.5,7382.5 v1(2335,7430)
  Top w25: LED11.1@680,7270 685,7275 v1(890,7275) 890,6795 v1(880,6785)
  Top w50: v2(-20,6045) v2@-18,6043 ; v2(-20,6585) 115,6585 C26.2@120,6580 ; v2@-18,6580 v2@-18,6043 ; CN6.5@160,2990 65,2990 -18,3073 -18,3930 SW22.3@53,4001 SW22.4@53,4501 -18,4572 v2@-18,6043 ; v2(3285,7152.5) 3325,7112.5 TX1.1@3325,7055 ; IC2.5@3740,5420 v2(3740,5675)
  Top w130: CN6.5@160,2990 CN6.6@160,3125 ; CN6.6@170,3115 350,3115 420,3185 3306,3185 3506,2985 3540,2985 CN7.6@3540,3112
  Bottom w10: LR6.2@889,6978.5 LR6.2@892.5,6975 ; v1(1104,7260) 1104,7271 1138,7305 1637,7305 1695,7247 v1(1695,7056) 1644,7005 C32.2@1637.5,7005 ; LR2.2@1195,6652.5 LR2.2@1199,6648.5 ; v1(1487,4242) 1509,4220 ; LC6.2@1488,4000 1426,4062 1426,4181 1465,4220 1509,4220 ; LC11.2@1680,4000 LC8.2@1770,4000 ; LC8.2@1770,4005 LC5.2@2132.5,4005 ; C28.2@1792.5,6860 1792.5,6926.5 v1(1788,6931) ; v1(1809.84,7035) 1788,7013.16 v1(1788,6931) ; C31.2@1827.5,7240 1827.5,7166.5 v1(1832,7162) ; v1(1848,4343) 1848,4324 1744,4220 1509,4220 ; R135.2@1880.5,6901 1850.5,6931 v1(1788,6931) ; v1(1927,7035) 1929.5,7037.5 C30.2@2080,7037.5
  Bottom w20: U4.4@247.5,6825 322.5,6825 C29.2@340,6842.5 ; v1(2183,3688) 2190,3695 C46.2@2190,3780 ; v1(2335,7430) 2367.5,7462.5 R96.2@2479,7462.5 ; R96.2@2484.5,7468 R96.2@2479,7462.5 ; v1(3000,6450) 3010,6460 TVS1.1@3010,6730 ; R76.2@3179,7462.5 R75.2@3079,7462.5 R74.2@2979,7462.5 R73.2@2879,7462.5 R99.2@2779,7462.5 R98.2@2679,7462.5 R97.2@2579,7462.5 R96.2@2479,7462.5
  Bottom w25: v2(-20,6045) -20,6460 125,6605 540,6605 587.5,6652.5 880,6652.5 ; v2(-20,6585) -30,6585 -60,6615 -60,6725 -30,6755 205,6755 247.5,6797.5 U4.4@247.5,6825 ; v1(880,6785) 880,6652.5 ; v1(890,7275) 892.5,7272.5 LR4.2@892.5,7200 LR3.2@892.5,7125 LR5.2@892.5,7050 LR6.2@892.5,6982 ; LR2.2@1195,6652.5 880,6652.5 ; v2@1451,3846 1441,3856 1441,3936 LC6.2@1510,4005 LC8.2@1770,4005 ; LC5.2@2132.5,4005 LC5.2@2145,4017.5 ; R76.2@3179,7462.5 3210,7462.5 3235,7437.5 3235,7152.5
  Bottom w30: U12.1@1701.97,3709.45 1701.97,3368.03 1882,3188 v2(1922,3188) 1975,3135 C48.2@2007.5,3135 2010,3135 2007.5,3132.5 U13.2@2007.5,2980
  Bottom w50: v2(-20,6045) 74,5951 266,5951 435,6120 435,6409 476,6450 v1(600,6450) v1(800,6450) v1(1000,6450) v1(1200,6450) v1(1500,6450) v1(1700,6450) v1(1900,6450) v1(2100,6450) v1(2400,6450) v1(2600,6450) v1(2800,6450) 2950,6450 ; CN6.5@160,2975 CN6.5@167.5,2982.5 ; v2@1451,3846 1451,3843 1467,3827 1467,3738 1495.55,3709.45 U12.1@1701.97,3709.45 ; v2(1922,3188) 1922,2188 IC3.2@2080,2030 ; C49.2@2675,7152.5 3235,7152.5 v2(3285,7152.5) 3317.5,7152.5 3410,7060 ; C51.2@2950,6325 2950,6450 ; v1(3000,6450) 2950,6450 ; v1@3010,6460 3410,6860 3410,7060 ; v2(3740,5675) 3720,5695 3720,7000 3670,7050 3420,7050 3410,7060
0V_ISO_CAN2: C52.2 IC1.5 J4.2 R27.2 TVS2.1 TX1.4 U5.2 | length 4305.6
  Top w25: v2(3337,4120) 3337,4048 3398,3987 J4.2@3477,3987 ; v2(3605,4695) 3615,4705 3655,4705 3740,4790 IC1.5@3740,4900
  Top w50: TX1.4@3325,6755 TX1.4@3325,6655 3325,6640 3502.5,6462.5 ; C52.2@3502.5,6370 3502.5,6462.5 ; v2(3555,6570) 3502.5,6517.5 3502.5,6462.5
  Bottom w25: v2(3337,4120) 3337,4341 3391,4395 3391,4453.5 R27.2@3415,4477.5 3362.5,4477.5 3332,4508 3332,4629 3380,4677 3380,4680 ; U5.2@3555,4797.5 3555,4740 3600,4695 v2(3605,4695) 3559.5,4649.5 3486.15,4649.5 3485.65,4650 3410,4650 3380,4680 ; v2(3555,6570) 3535,6570 3420,6455 3420,4913 3380,4873 3380,4680
  Bottom w50: TVS2.1@3550,6730 3555,6725 v2(3555,6570)
5V_ISO_CAN2: C52.1 IC1.8 IC2.2 R132.2 TVS2.2 TX1.7 U5.3 | length 3156.6
  Top w25: v2(3440,4800) IC1.8@3440,4900 3365,4975 3365,5155 3385,5175 3510,5175 3540,5145
  Top w50: v2(3470,5555) 3475,5560 3520,5560 3760,5800 3760,6315 3755,6320 3755,6322.5 C52.1@3707.5,6370 3725,6387.5 TX1.7@3725,6755 3670,6755 3635,6790 v2(3635,6900) ; v2(3520,5230) 3540,5210 3540,5145 IC2.2@3540,5070
  Bottom w25: v2(3440,4800) 3440,4857.5 R132.2@3540,4957.5 3540,4935 3605,4870 U5.3@3605,4797.5
  Bottom w50: v2(3470,5555) 3470,5280 v2(3520,5230) ; TVS2.2@3550,6900 v2(3635,6900)
24C: BR1.2 C25.2 C53.1 IC3.4 MOV1.2 MOV2.2 MOV3.2 MOV4.2 MOV5.2 MOV6.2 MOV7.2 MOV8.2 MOV9.2 MOV10.2 MOV11.2 MOV12.2 R17.2 R18.2 R19.2 R20.2 R21.2 R22.2 R23.2 R24.2 R65.2 R66.2 R67.2 R68.2 R69.2 R70.2 R71.2 R72.2 R100.2 R101.2 R102.2 R103.2 R112.2 R113.2 R114.2 R115.2 U1.2 U1.4 U1.6 U1.8 U2.2 U2.4 U2.6 U2.8 U3.2 U3.4 U3.6 U3.8 | length 20503.2
  Top w25: R17.2@637.5,5600 650,5612.5 U1.2@650,5750 ; R18.2@850,5612.5 U1.4@850,5750 850,5823 853,5826 ; 1049,5826 1050,5825 U1.6@1050,5750 R19.2@1050,5612.5 ; R20.2@1250,5612.5 U1.8@1250,5750 1250,5825 ; R112.2@1550,5612.5 U2.2@1550,5750 1550,5821 1555,5826 ; R113.2@1750,5612.5 U2.4@1750,5750 1750,5825 ; R114.2@1950,5612.5 U2.6@1950,5750 1950,5826 ; R115.2@2150,5612.5 U2.8@2150,5750 2150,5821 2155,5826 ; R21.2@2450,5612.5 U3.2@2450,5750 2450,5826 ; R22.2@2650,5612.5 U3.4@2650,5750 2650,5825 ; R23.2@2850,5612.5 U3.6@2850,5750 2850,5824 2852,5826 ; R24.2@3050,5612.5 U3.8@3050,5750
  Top w50: MOV1.2@548,3705 MOV2.2@698,3705 MOV3.2@848,3705 MOV4.2@998,3705 MOV5.2@1148,3705 MOV6.2@1298,3705 ; BR1.2@570,2131 640,2131 v3(683,2174) ; U1.2@650,5750 650,5790 686,5826 853,5826 1049,5826 1555,5826 1950,5826 2155,5826 2450,5826 2852,5826 3017,5826 3050,5793 U3.8@3050,5750 ; v3@686.95,2135 1390,2135 C53.1@1398,2143 1848,2143 1880,2111 ; IC3.4@1880,2030 1880,2111 ; MOV7.2@2400,3700 MOV8.2@2550,3700 MOV9.2@2700,3700 MOV10.2@2850,3700 MOV11.2@3000,3700 MOV12.2@3150,3700 ; v3(3259,2214) 2607.5,2214 C25.2@2507.5,2114 2477.5,2144 1913,2144 1880,2111
  Bottom w50: 479,3776 551,3704 551,3534 683,3402 v3(683,2174) ; MOV1.2@548,3705 446,3807 446,4373 355,4464 355,5701 491,5837 611,5837 650,5798 U1.2@650,5750 ; IC3.4@1880,2030 1880,1246 1791,1157 1791,550 1676,435 661,435 580,354 580,73 624,29 R65.2@755,29 R66.2@955,29 R67.2@1155,29 R68.2@1355,29 R69.2@1555,29 R70.2@1755,29 R71.2@1955,29 R72.2@2155,29 R100.2@2355,29 R101.2@2555,29 R102.2@2755,29 R103.2@2955,29 ; MOV12.2@3150,3700 3165,3685 3165,2900 3259,2806 v3(3259,2214)
120VAC: CN6.2 CN7.2 | length 3380
  Top w80: CN6.2@160,2525 CN7.2@3540,2525
+3.3V: C46.1 LC6.1 LC14.1 LCD1.3 LCD1.23 LCD1.24 U12.2 | length 1699
  Top w10: 1603.94,4219.94 1603.94,4241 ; LCD1.3@1603.94,4267.98 1603.94,4241 ; LCD1.23@1997.64,4267.98 1997.64,4199.36 v1(2009,4188) ; LCD1.24@2017.32,4267.98 2017.32,4196.32 v1(2009,4188) ; 1603.94,4241 1603.94,4184.94 v1(1593,4174) 1631,4136 1957,4136 v1(2009,4188)
  Bottom w10: LC6.1@1510,4136 LC6.1@1510,4115 1510,4148 1536,4174 v1(1593,4174) ; v1(2009,4188) 2036,4161 2055,4161 ; LC14.1@2055,4105 2055,4161 ; C46.1@2190,3890 2190,4153 2162,4181 2106,4181 2086,4161 2055,4161
  Bottom w20: U12.2@1948.03,3800 2038.03,3890 C46.1@2190,3890
+5V: C26.1 C27.1 C28.1 C29.1 C30.1 C31.1 C32.1 C33.1 C47.2 C48.1 C49.1 C50.1 C51.1 CN6.7 CN6.8 CN7.7 CN7.8 CN10.2 IC1.2 IC2.8 IC3.1 LR7.2 MCU1.10 MCU1.19 MCU1.26 MCU1.38 MCU1.57 R89.2 R92.2 R93.2 R94.1 R129.2 R130.2 R134.2 SW101.1 SW101.2 SW101.3 SW101.4 SW101.5 SW101.6 SW101.7 SW101.8 TVS1.2 TX1.2 U1.10 U1.12 U1.14 U1.16 U2.10 U2.12 U2.14 U2.16 U3.10 U3.12 U3.14 U3.16 U4.2 U6.1 U6.3 U7.1 U7.3 U8.1 U8.3 U9.1 U9.3 U10.1 U10.3 U11.1 U11.3 U12.3 U13.1 | length 34362.4
  Top w10: v1(1463,7234) LR7.2@1463,7300 ; v1(1486,7007) 1493,7007 1504.53,6995.47 MCU1.10@1581.5,6995.47 1679.53,6995.47 1691.73,6983.27 MCU1.19@1691.73,6806.5 1692,6806.23 v1(1692,6516) ; v1(1661,6884) 1690.73,6884 ; 1692.52,6975.79 v1(1751,6975.79) 1883,6975.79 1883,6935 1894,6924 1952,6924 1965,6937 1965,6968 1972.79,6975.79 MCU1.38@2018.5,6975.79 ; v1@1764,7164 1790.16,7190.16 MCU1.57@1790.16,7243.5 ; MCU1.26@1829.53,6806.5 1829.53,6975.26
  Top w20: C33.1@171,6406.5 C33.1@172.5,6405 278,6405 ; v1(1702,3806) 1881,3627 v2(1881,3582)
  Top w25: CN10.2@284.5,7064 484,7064 ; v2@320,6471 320,6615 485,6780 ; R89.2@547.5,7510 547.5,7462.5 560,7450 ; R94.1@555,7302.5 487.5,7302.5 485,7300 ; R93.2@565,7032.5 487.5,7032.5 485,7030 ; R92.2@570,6777.5 487.5,6777.5 485,6780 ; 748,5974 750,5976 U1.14@750,6050 ; v1(900,7450) 560,7450 ; 950,5975 U1.12@950,6050 ; 1150,5974 U1.10@1150,6050 ; 1445,5974 1450,5979 U2.16@1450,6050 ; 1650,5974 U2.14@1650,6050 ; 1850,5975 U2.12@1850,6050 ; 2045,5974 2050,5979 U2.10@2050,6050 ; 2350,5975 U3.16@2350,6050 ; 2550,5975 U3.14@2550,6050 ; 2747,5974 2750,5977 U3.12@2750,6050 ; v1(3360,5445) 3415,5445 IC2.8@3440,5420 3440,5330 3465,5305 v2(3575,5305) ; CN7.8@3540,3425 3673,3425 3730,3482 3730,4043 3631,4142 3631,4439 3613,4457 3568,4457 3540,4485 IC1.2@3540,4550 ; 485,6780 v1(485,6925) 485,7030 ; 485,7030 485,7300 ; 485,7300 485,7415 520,7450 560,7450
  Top w50: CN6.8@160,3425 115,3425 47,3493 47,3858 135,3946 135,4572 47,4660 v2(47,5777) 47,6258 111,6322 195,6322 278,6405 v2(332,6459) 320,6471 230,6561 C26.1@230,6580 ; U1.16@550,6050 550,5974 ; U6.3@600,5295 600,5190 ; U6.1@800,5295 800,5190 ; U7.3@1100,5295 1100,5195 1105,5190 ; U7.1@1300,5295 1300,5190 ; U8.3@1600,5295 1600,5190 ; U8.1@1800,5295 1800,5190 ; U9.3@2100,5295 2100,5195 2105,5190 ; IC3.1@2180,2030 2252,2030 2364,1918 3322,1918 3481,2077 3685,2077 v3(3685,2084) ; C50.1@2220,7177.5 2378.5,7177.5 SW101.1@2477,7079 ; U9.1@2300,5295 2300,5195 2295,5190 ; v2(2378,6915) 2378,7022 2431,7075 2473,7075 SW101.1@2477,7079 ; U10.3@2600,5295 2600,5190 ; U10.1@2800,5295 2800,5195 2795,5190 ; U3.10@2950,6050 2950,6010 2914,5974 2747,5974 2045,5974 1650,5974 1445,5974 1150,5974 748,5974 550,5974 ; U11.3@3100,5295 3100,5195 3105,5190 ; SW101.8@3177,7079 SW101.7@3077,7079 SW101.6@2977,7079 SW101.5@2877,7079 SW101.4@2777,7079 SW101.3@2677,7079 SW101.2@2577,7079 SW101.1@2477,7079 ; v2(3230,6900) 3230,6945 3240,6955 TX1.2@3325,6955 ; U11.1@3300,5295 3300,5190 3105,5190 ; 550,5974 465,5974 v2(268,5777) 268,5297 375,5190 600,5190 ; 600,5190 800,5190 ; 800,5190 1105,5190 ; 1105,5190 1300,5190 ; 1300,5190 1600,5190 ; 1600,5190 1800,5190 ; 1800,5190 2105,5190 ; 2105,5190 2295,5190 ; 2295,5190 2600,5190 ; 2600,5190 2795,5190 ; 2795,5190 3105,5190
  Top w100: CN6.7@160,3275 210,3325 ; CN6.8@160,3425 160,3350 185,3325 210,3325 ; CN7.7@3540,3275 3490,3325 ; 3540,3325 3490,3325 ; 210,3325 v2(1881,3325) 3490,3325
  Top w130: 3540,3325 CN7.8@3540,3425
  Bottom w10: v1(1463,7234) 1486,7211 v1(1486,7007) 1488,7005 C32.1@1572.5,7005 ; v1(1661,6884) 1685,6860 C28.1@1727.5,6860 ; v1(1751,6975.79) 1751,7152 v1(1763,7164) ; v1@1762.5,7164.5 C31.1@1762.5,7240 ; v1(1882,6975) 1882,6983 1898,6999 2015,6999 2041.5,6972.5 C30.1@2080,6972.5
  Bottom w20: U4.2@247.5,6925 v1(485,6925) ; C47.2@1570,3802.5 1573.5,3806 v1(1702,3806) ; v1(1702,3806) U12.3@1701.97,3890.55
  Bottom w25: v1(900,7450) 935,7415 R129.2@1572.5,7415 ; v2(1881,3325) v2(1881,3582) ; C30.1@2080,6972.5 2112.5,6972.5 2200,7060 2322,7060 2378,7004 v2(2378,6915) ; U3.10@2950,6050 2950,5940 2980,5910 3060,5910 3140,5830 3140,5665 v1(3360,5445) ; R130.2@3570,5527.5 3575,5522.5 v2(3575,5305)
  Bottom w30: v2(1881,3325) 1995,3325 2072.5,3247.5 C48.1@2072.5,3135 2092.5,3115 U13.1@2092.5,3015
  Bottom w50: v2(47,5777) v2(268,5777) ; R134.2@145.5,4136 145.5,3928.5 -2,3781 -2,3471 44,3425 CN6.8@160,3425 ; v2(332,6459) 387,6514 2261,6514 2378,6631 v2(2378,6915) 2642.5,6915 C49.1@2675,6947.5 ; C49.1@2685,6915 2995,6915 TVS1.2@3010,6900 v2(3230,6900) ; U3.10@2950,6050 C51.1@2950,6215 ; CN7.7@3540,3275 3672,3275 3710,3237 3710,2109 v3(3685,2084)